# EAGLE board driver ckt - Copy (2) (EAGLE 8.4.3)
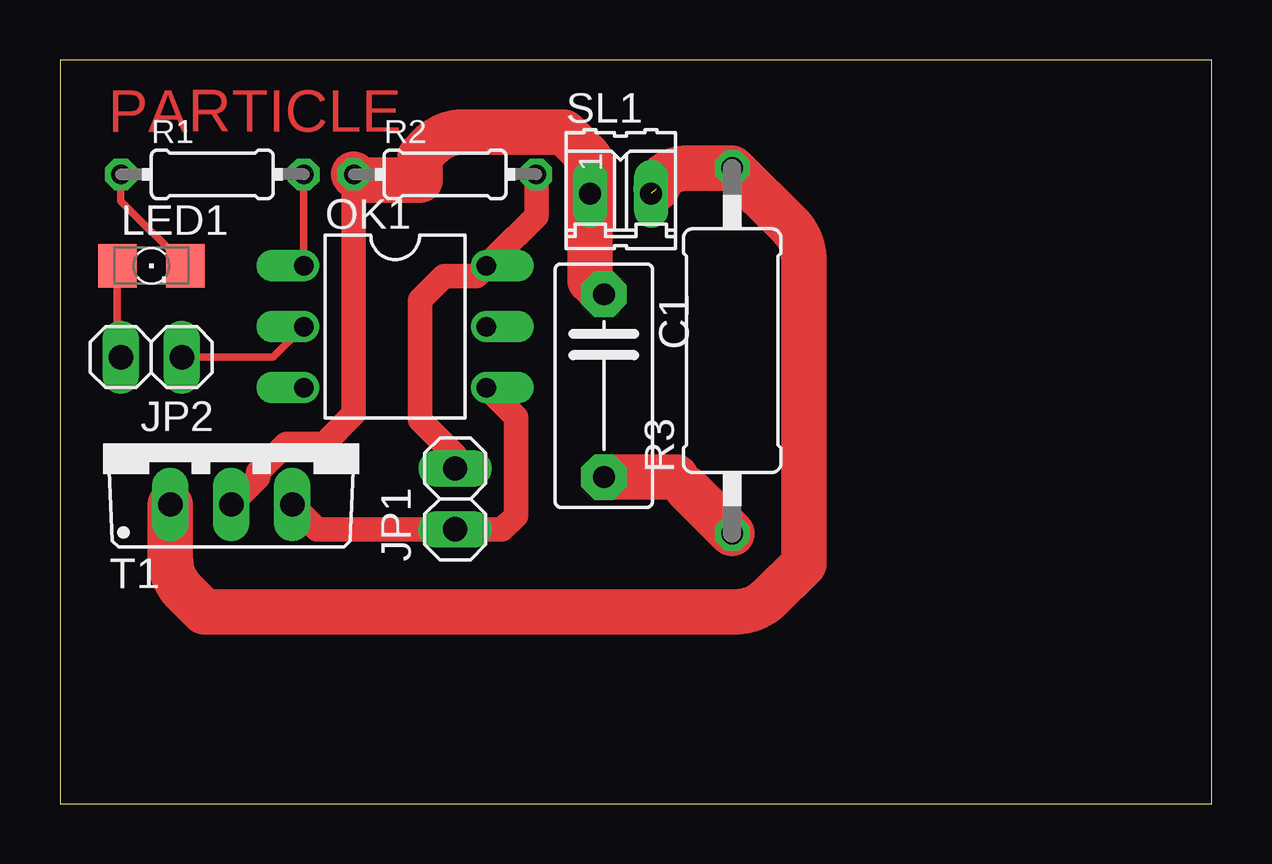
[diagram p0: board, top side]

Size 48 x 31 mm. Coordinates in mm from the lower left corner, seen from the top.
Outline: 0,0 48,0 48,31 0,31 0,0
Copper layers (1*16): Top 0.035mm / dielectric 1.5mm / Bottom 0.035mm
Design rules "default": minimum track width 6mil, minimum drill 0.35mm, track to track 6mil, track to pad 6mil, pad to pad 6mil, via to via 6mil, smd to smd 6mil, copper to edge 40mil, drill to drill 6mil, minimum pad ring 10mil, minimum via ring 8mil, stop-mask expansion 4mil, vias tented up to drill 0mil, thermal gap 10mil

## Footprints (pad centres in the part's own frame; a part is rotated, then mirrored left to right if it is on the bottom)
C7.5B4 = drill 0.914 pad 1.905 octagon: 1 -3.81,0; 2 3.81,0
1X02 = drill 1.016 long: 1 -1.27,0; 2 1.27,0
LED_1206 = smd 1.6 x 1.803: A -1.422,0; C 1.422,0
DIL06 = drill 0.813 offset: 1 -2.54,-3.81; 2 0,-3.81; 3 2.54,-3.81; 4 2.54,3.81; 5 0,3.81; 6 -2.54,3.81
0204/7 = drill 0.813 octagon: 1 -3.81,0; 2 3.81,0
0411/15 = drill 0.914 octagon: 1 -7.62,0; 2 7.62,0
02P = drill 0.914 long: 1 -1.27,0; 2 1.27,0
TO220BV = drill 1.016 long: G 2.54,-2.54; T1 -2.54,-2.54; T2 0,-2.54

## Placement (x,y rotation side)
C1  [C7.5B4]  22.67,17.42 270 top
JP1  [1X02]  16.47,12.7 90 top
JP2  [1X02]  3.81,18.61 180 top
LED1  [LED_1206]  3.81,22.42 0 top
OK1  MOC3011M  [DIL06]  13.97,19.88 270 top
R1  [0204/7]  6.35,26.23 0 top
R2  [0204/7]  16.05,26.23 0 top
R3  [0411/15]  28.02,18.88 90 top
SL1  [02P]  23.37,25.42 0 top
T1  BT138-V  [TO220BV]  7.14,15.01 0 top

## Library data of the parts
C1 = capacitor-wima
JP1 JP2 = pinhead
LED1 = eagle-ltspice; SPICEMODEL: NONE; SPICEPREFIX: D; SPICETYPE: diode
OK1 = optocoupler; MF: FAIRCHILD SEMICONDUCTOR; MPN: MOC3011-M; OC_FARNELL: 1021363; OC_NEWARK: 72K8893
R1 R2 = eagle-ltspice; SPICEMODEL: NONE; SPICEPREFIX: R
R3 = resistor
SL1 = con-amp-quick; OC_FARNELL: unknown; OC_NEWARK: unknown
T1 = triac

## Nets
N$1: LED1.C R1.1
N$2: OK1.1 R1.2
N$3: JP2.2 LED1.A
N$4: JP2.1 OK1.2
N$5: JP1.2 OK1.6 R2.2
N$7: JP1.1 OK1.4 T1.G
N$8: R3.2 SL1.2 T1.T1
N$9: C1.2 R3.1
N$10: C1.1 R2.1 SL1.1 T1.T2

## Tracks (layer width: path | path; a pad name or v marks a point on that pad's centre or on a via)
N$1
  Top 0.305: R1.1 2.54,25.11 LED1.C
N$2
  Top 0.305: R1.2 OK1.1
N$3
  Top 0.305: LED1.A 2.39,18.76 JP2.2
N$4
  Top 0.305: JP2.1 8.89,18.61 OK1.2
N$5
  Top 1.016: R2.2 19.86,24.5 18.18,22.82 OK1.6 17.36,22 16,22 15,21 15,16 16.47,14.53 JP1.2
N$7
  Top 1.016: T1.G 10.72,11.43 JP1.1 18.43,11.43 19,12 19,16.12 OK1.4
N$8  (1 unrouted)
  Top 1.905: T1.T1 4.6,10.19 arc45 5.16,8.84 6,8 28.21,8 arc45 29.56,8.56 31,10 31,22.73 arc45 30.44,24.08 R3.2 26.21,26.5 arc45 25,26 arc-45 24.84,25.62
N$9
  Top 1.016: 26.14,13.14 25.67,13.61
  Top 1.905: R3.1 26.14,13.14 | 25.67,13.61 C1.2
N$10
  Top 1.016: T1.T2 8.26,13.59 8.26,13.82 9.44,15 11,15 12.24,16.24 R2.1 | 22.1,21.8 SL1.1 22,25.52 22,27
  Top 1.905: C1.1 22.1,21.8 22.1,26.76 arc45 22,27 21,28 16.79,28 arc45 15.44,27.44 15,27 15,26 12.79,26 arc-45 R2.1

## Text on the board
Top: PARTICLE